# Altium PCB esc_four_layer.PcbDoc
Units mil, origin at the board's own origin, x right, y up, seen from the top; angles counter-clockwise.
Board outline 6000 x 4000 mil, 4 copper layers (Component Side, Ground Plane, Power Plane, Solder Side), stack 60.4 mil thick; 66 components, 36 nets, 187 pads, 6 vias.
Unrouted connection lines stored in the file: 139.
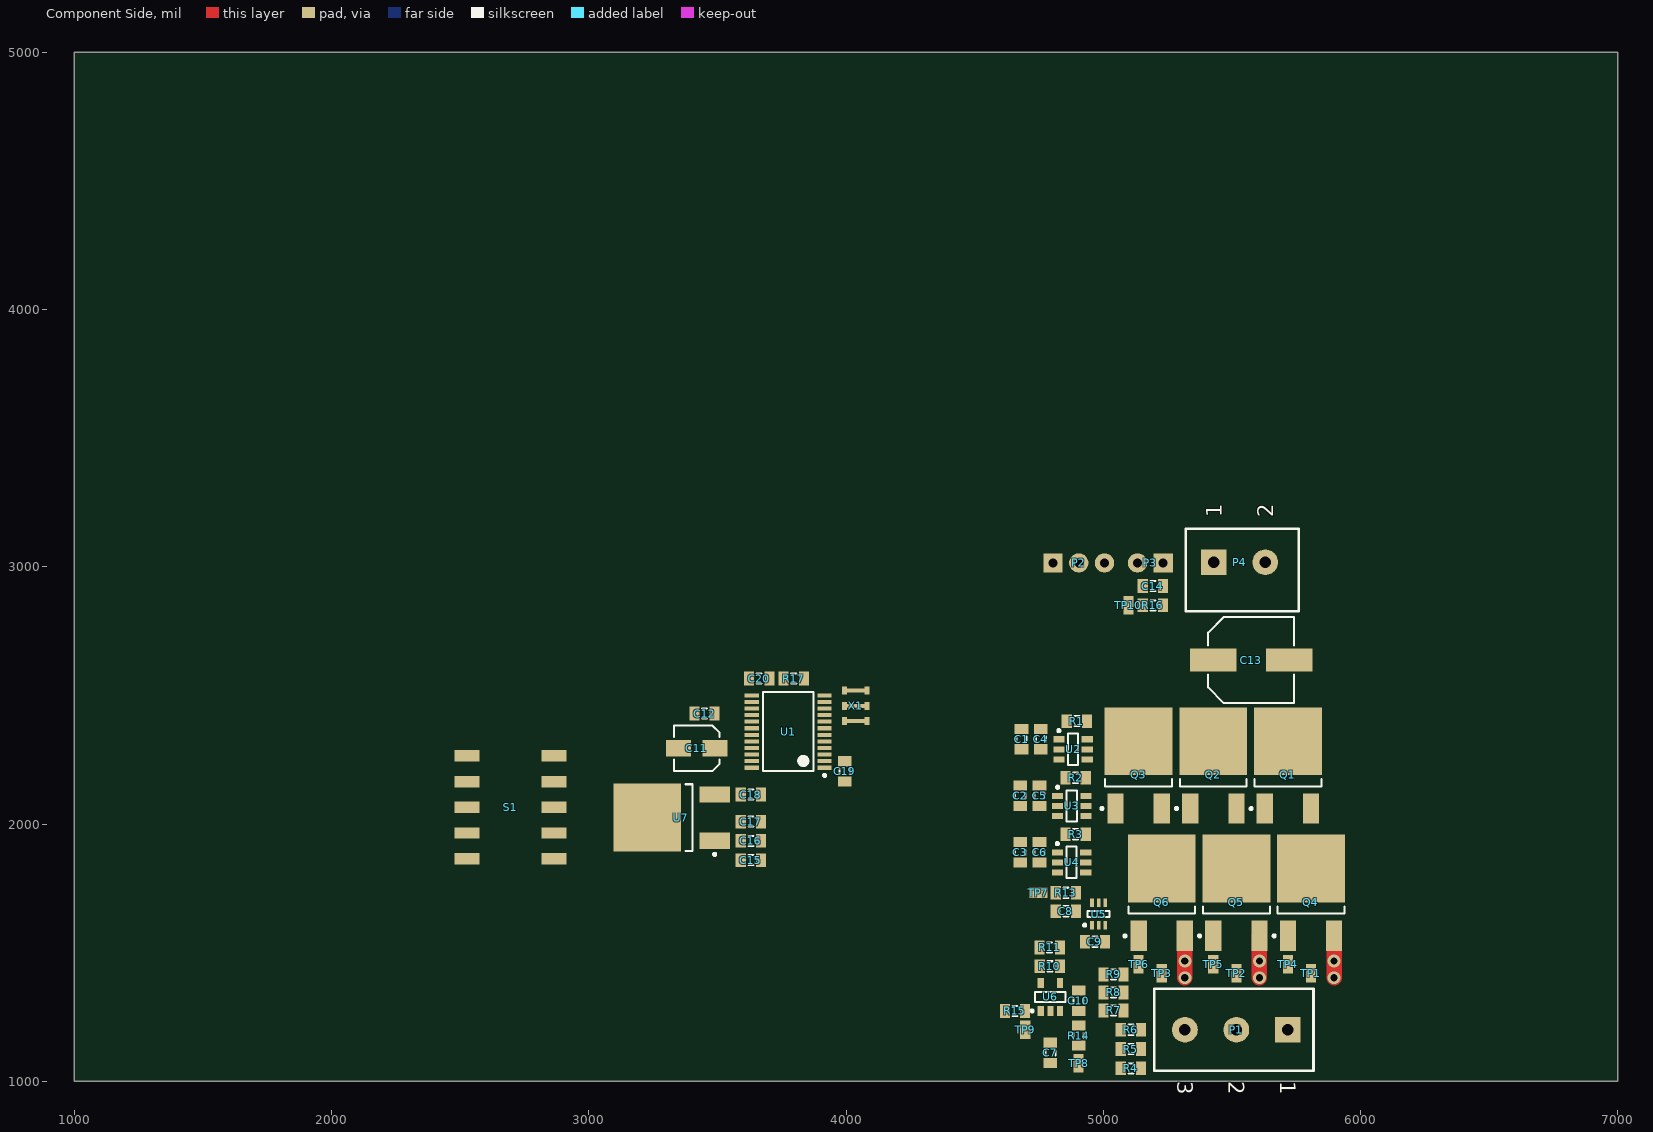
[diagram p0: Component Side view]
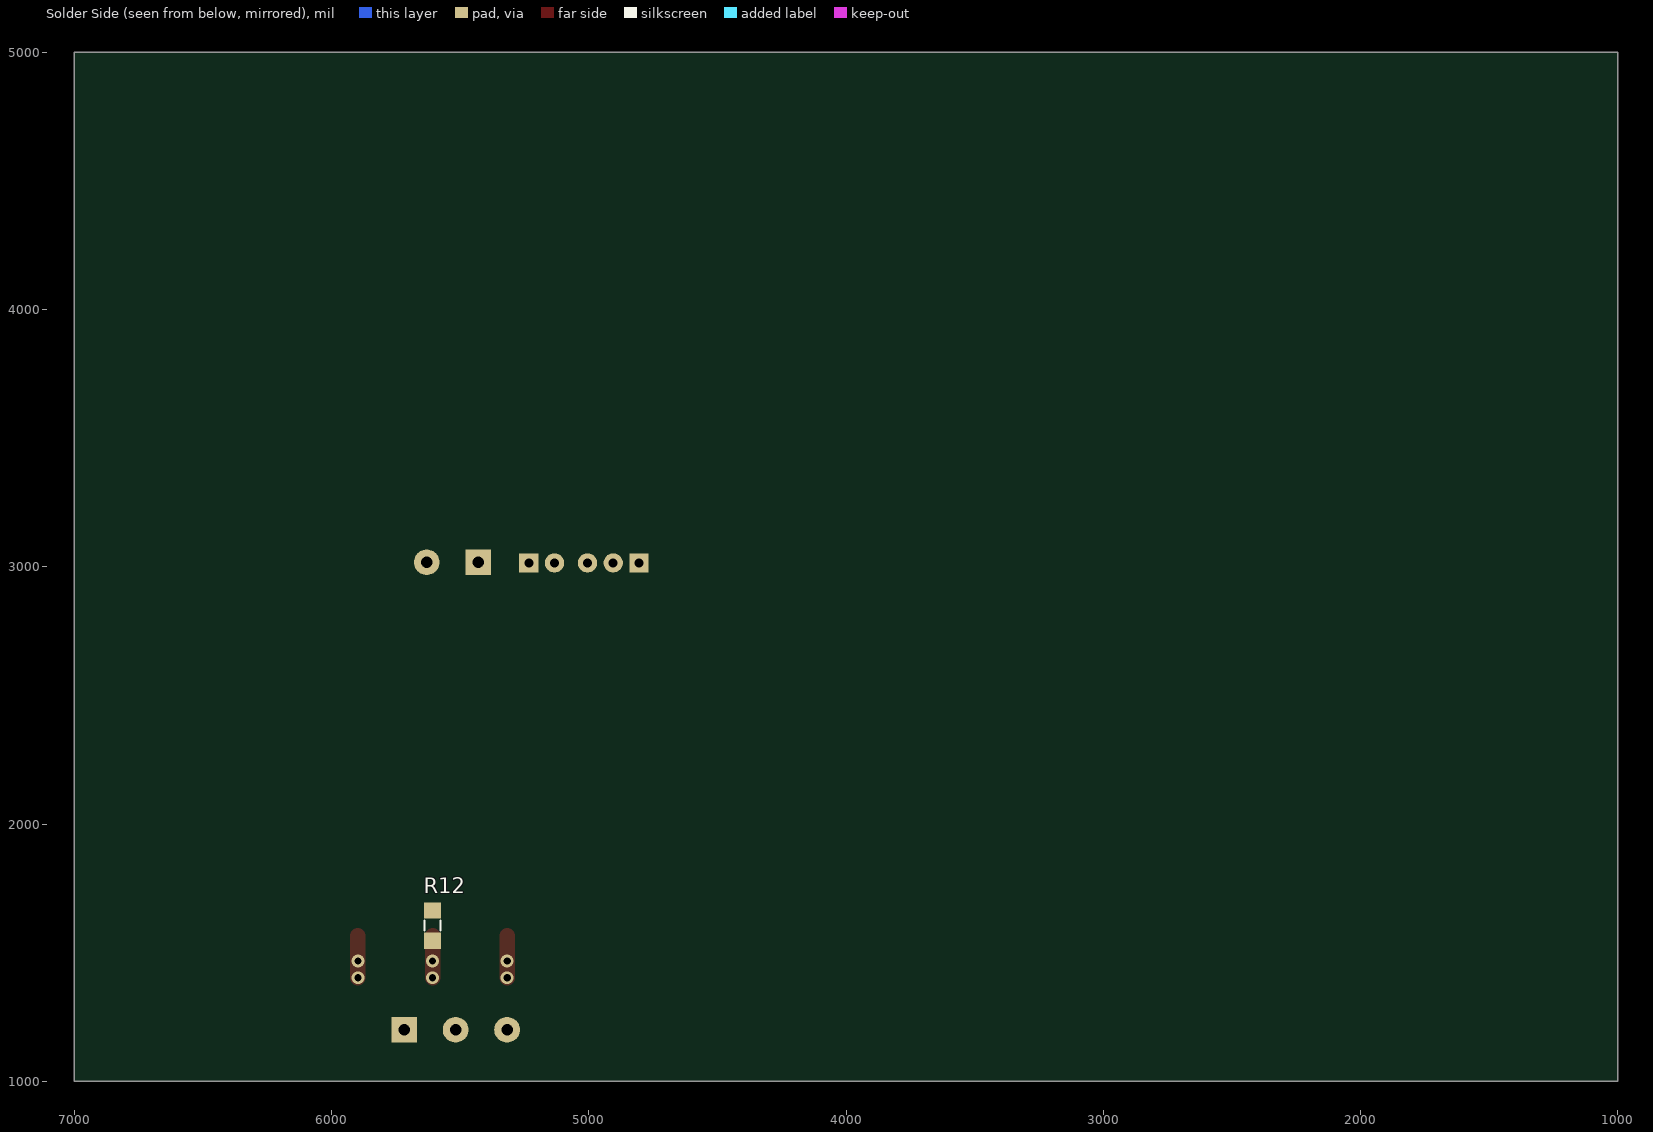
[diagram p1: Solder Side view, seen from below]
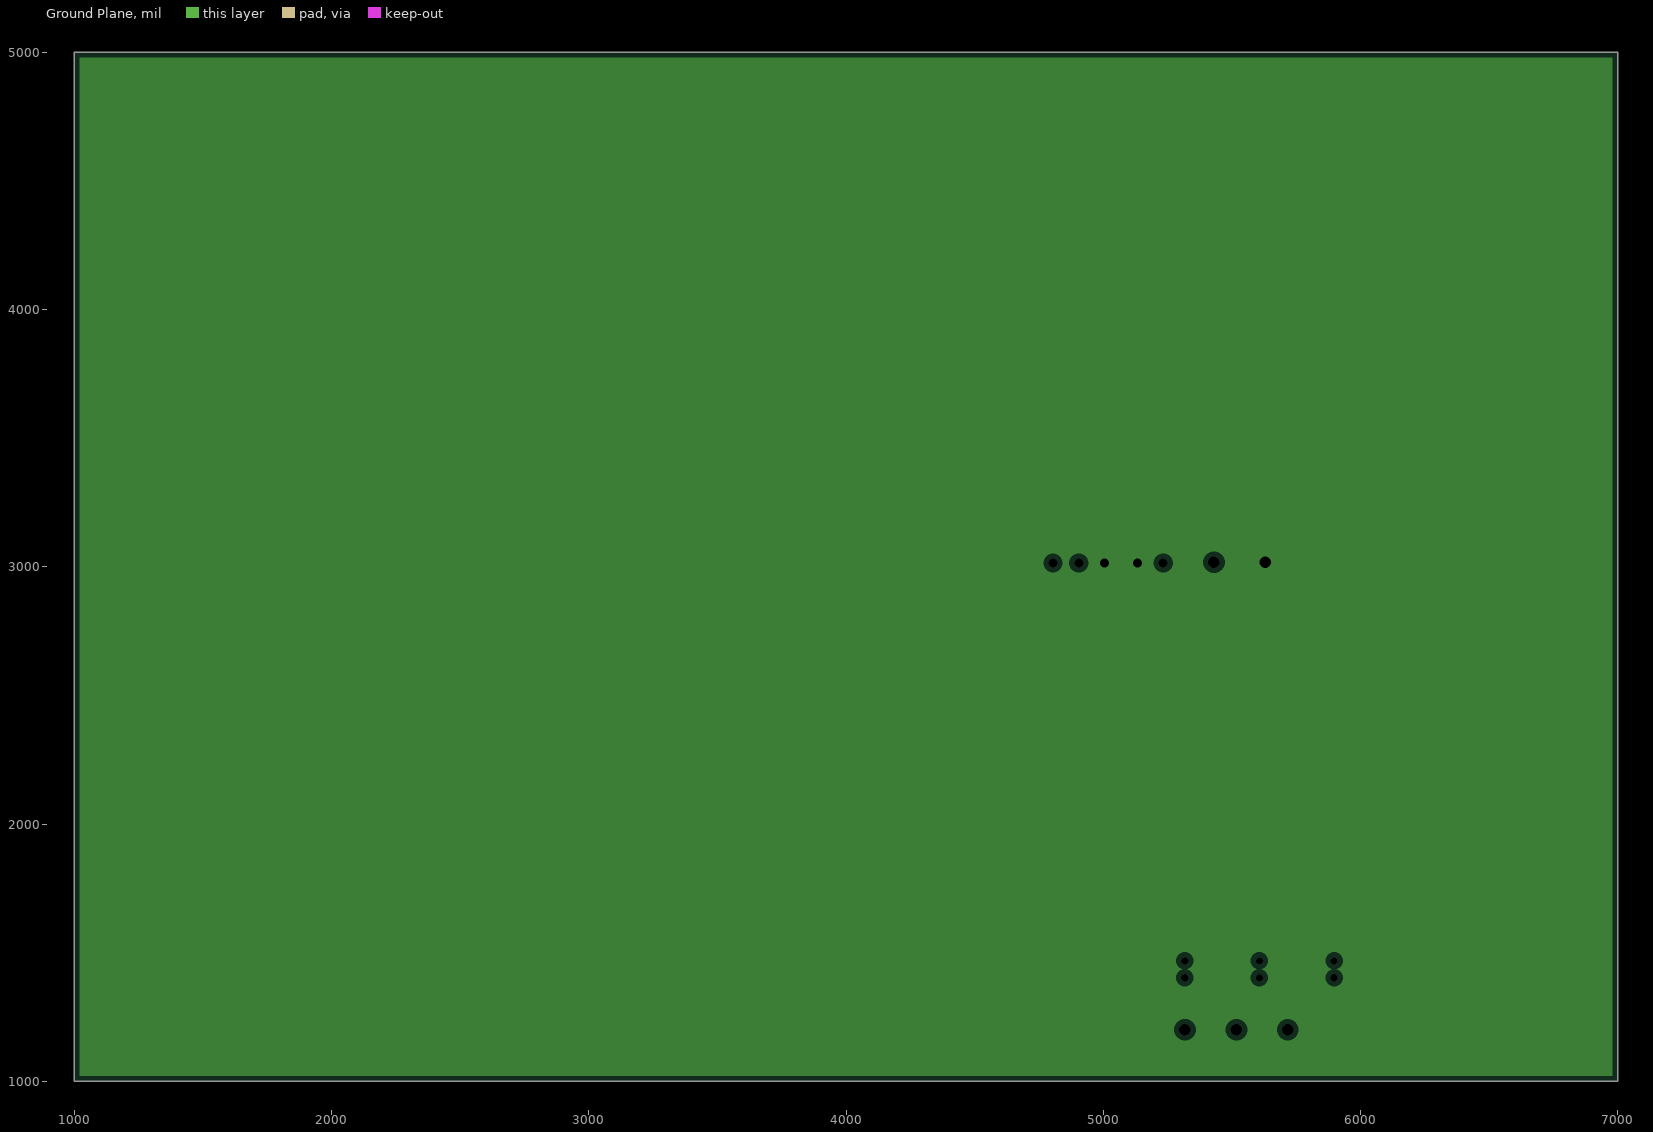
[diagram p2: Ground Plane, clearances drawn from the general rule]
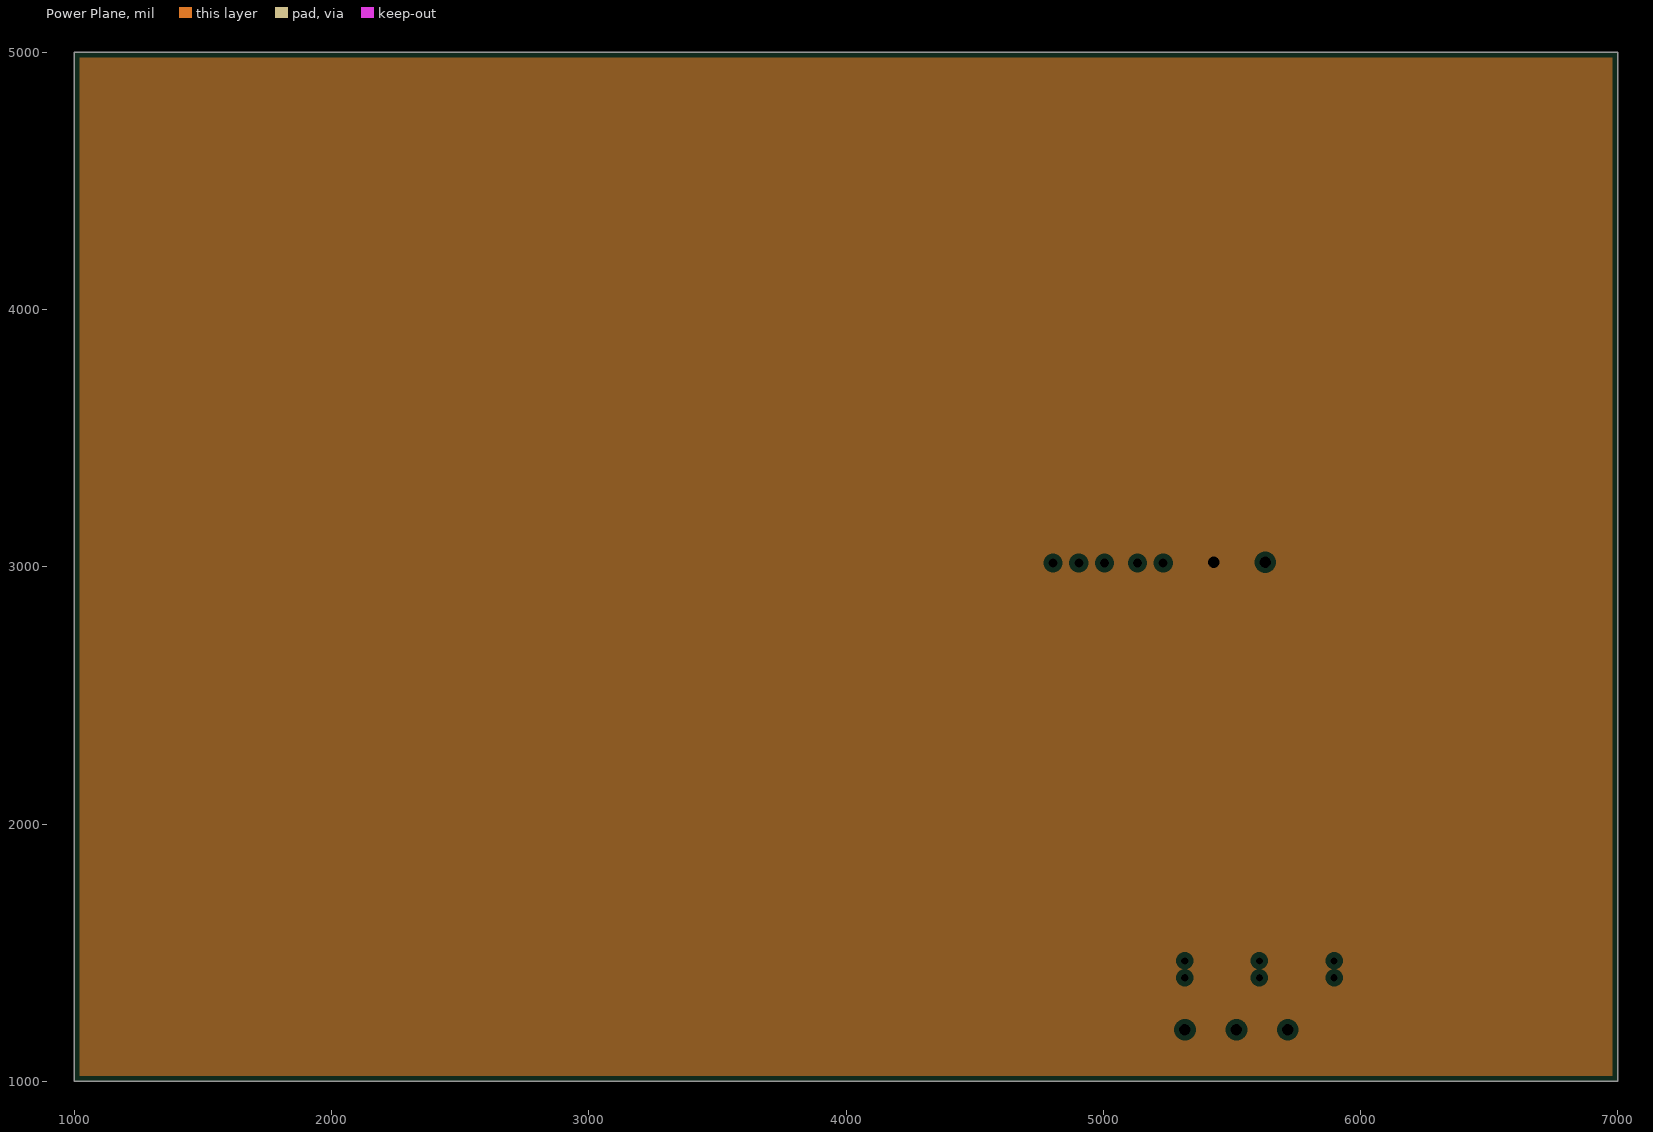
[diagram p3: Power Plane, clearances drawn from the general rule]

## Layer stack, top to bottom
Top Solder: solder mask 0.4, Solder Resist, Dk 3.5
Component Side: signal copper 1.4
Dielectric 1: prepreg 7.5, Dk 4.3
Ground Plane: plane copper 2.8, net GND
Dielectric 3: core 37, FR-4, Dk 4.3
Power Plane: plane copper 2.8, net VBATT+
Dielectric 4: prepreg 7.5, Dk 4.3
Solder Side: signal copper 1.4
Bottom Solder: solder mask 0.4, Solder Resist, Dk 3.5

## Board outline
1000,1000 7000,1000 7000,5000 1000,5000

## Design rules (kind name [scope] priority, off if disabled: settings)
Clearance [All] p1: gap=6 ignorepadtopadclearanceinfootprint=FALSE except(0: Arc-Hole Track-Hole SMDPad-Hole THPad-Hole Via-Hole Fill-Hole Poly-Hole Region-Hole Text-Hole)
PlaneClearance [All] p1: clearance=20
PlaneConnect [All] p1: planeconnectstyle=Relief reliefexpansion=20 reliefentries=4 reliefconductorwidth=10 reliefairgap=10
PolygonConnect PolygonConnect_8 [All vs IsNamedPolygon('VBATT+_L02_P028')] p1: connectstyle=Direct reliefconductorwidth=10 reliefentries=4 polygonreliefangle="90 Angle" airgapwidth=10
PolygonConnect PolygonConnect_7 [All vs IsNamedPolygon('GND_L01_P026')] p2: connectstyle=Direct reliefconductorwidth=10 reliefentries=4 polygonreliefangle="90 Angle" airgapwidth=10
PolygonConnect PolygonConnect_6 [All vs IsNamedPolygon('GND_L01_P024')] p3: connectstyle=Direct reliefconductorwidth=10 reliefentries=4 polygonreliefangle="90 Angle" airgapwidth=10
PolygonConnect PolygonConnect_5 [All vs IsNamedPolygon('GND_L01_P022')] p4: connectstyle=Direct reliefconductorwidth=10 reliefentries=4 polygonreliefangle="90 Angle" airgapwidth=10
PolygonConnect PolygonConnect_4 [All vs IsNamedPolygon('GND_L01_P020')] p5: connectstyle=Direct reliefconductorwidth=10 reliefentries=4 polygonreliefangle="90 Angle" airgapwidth=10
PolygonConnect PolygonConnect_3 [All vs IsNamedPolygon('GND_L01_P018')] p6: connectstyle=Direct reliefconductorwidth=10 reliefentries=4 polygonreliefangle="90 Angle" airgapwidth=10
PolygonConnect PolygonConnect_2 [All vs IsNamedPolygon('GND_L01_P016')] p7: connectstyle=Direct reliefconductorwidth=10 reliefentries=4 polygonreliefangle="90 Angle" airgapwidth=10
PolygonConnect PolygonConnect_1 [All vs IsNamedPolygon('GND_L01_P014')] p8: connectstyle=Direct reliefconductorwidth=10 reliefentries=4 polygonreliefangle="90 Angle" airgapwidth=10
PolygonConnect TOP-GND-1 [All vs IsNamedPolygon('TOP-GND-1')] p9: connectstyle=Direct reliefconductorwidth=10 reliefentries=4 polygonreliefangle="90 Angle" airgapwidth=10
PolygonConnect FET-RETURN [All vs IsNamedPolygon('FET-RETURN')] p10: connectstyle=Direct reliefconductorwidth=10 reliefentries=4 polygonreliefangle="90 Angle" airgapwidth=10
PolygonConnect VBATT-IN_1 [All vs IsNamedPolygon('VBATT-IN')] p11: connectstyle=Direct reliefconductorwidth=10 reliefentries=4 polygonreliefangle="90 Angle" airgapwidth=10
PolygonConnect VBATT-IN [All vs IsNamedPolygon('VBATT-IN')] p12: connectstyle=Direct reliefconductorwidth=10 reliefentries=4 polygonreliefangle="90 Angle" airgapwidth=10
PolygonConnect VBATT-decoupling [All vs IsNamedPolygon('Top Layer-VBATT+')] p13: connectstyle=Direct reliefconductorwidth=10 reliefentries=4 polygonreliefangle="90 Angle" airgapwidth=10
PolygonConnect 5V-plane [All vs IsNamedPolygon('5V')] p14: connectstyle=Direct reliefconductorwidth=10 reliefentries=4 polygonreliefangle="90 Angle" airgapwidth=10
PolygonConnect [All] p15: connectstyle=Relief reliefconductorwidth=10 reliefentries=4 polygonreliefangle="90 Angle" airgapwidth=10
RoutingVias [All] p1: holewidth=28 width=50 viastyle="Through Hole" minholewidth=28 minwidth=50 maxholewidth=28 maxwidth=50
SolderMaskExpansion [All] p1: expansion=4
Width [All] p1: maxlimit=118.11 minlimit=5.98 preferedwidth=10
28 further rules are at their usual default settings.

## Classes and differential pairs
component class "Output Stage": C1 C2 C3 C4 C5 C6 C7 C8 C9 C10 Q1 Q2 Q3 Q4 Q5 Q6 R1 R2 R3 R4 R5 R6 R7 R8 R9 R10 R11 R12 R13 R14 R15 TP1 TP2 TP3 TP4 TP5 TP6 TP7 TP8 TP9 U2 U3 U4 U5 U6
component class esc: C11 C12 P1 P2 S1 U1 X1
component class "ESC Control Inputs": C13 C14 C15 C16 C17 C18 C19 C20 P3 P4 R16 R17 TP10 U7

## Components (designator, comment, footprint, x,y, rotation, side; value= is the part's Value field where it differs from the comment)
C1 "1 uF" CAP-CER-0805-TALL 4682.5,2329.99 r90 top
C2 "1 uF" CAP-CER-0805-TALL 4677.5,2109.99 r90 top
C3 "1 uF" CAP-CER-0805-TALL 4677.5,1889.99 r90 top
C4 "0.1 uF" CAP-CER-0805-SHORT 4757.5,2329.99 r90 top
C5 "0.1 uF" CAP-CER-0805-SHORT 4752.5,2109.99 r90 top
C6 "0.1 uF" CAP-CER-0805-SHORT 4752.5,1889.99 r90 top
C7 "0.1 uF" CAP-CER-0805-SHORT 4794.38,1110 r90 top
C8 "10 nF" CAP-CER-0805-SHORT 4855.01,1660.81 r0 top
C9 "0.1 uF" CAP-CER-0805-SHORT 4967.88,1542.5 r0 top
C10 "22 pF" CAP-CER-0805-SHORT 4904.38,1312.72 r270 top
C11 "22uF" CAP-CAN-5.3x5.3 3420,2294.38 r180 top
C12 "0.1 uF" CAP-CER-0805-SHORT 3450,2429.38 r0 top
C13 "220 uF" CAP-CAN-8.3x8.3 5575,2637.49 r0 top
C14 "10 nF" CAP-CER-0805-SHORT 5193.12,2925 r0 top
C15 "0.22 uF" CAP-CER-0805-SHORT 3630,1859.38 r180 top
C16 "0.1 uF" CAP-CER-0805-SHORT 3630,1934.38 r180 top
C17 "10 nF" CAP-CER-0805-SHORT 3630,2009.38 r180 top
C18 "0.1 uF" CAP-CER-0805-SHORT 3630,2114.38 r180 top
C19 "0.47 uF" CAP-CER-0805-TALL 3995,2204.38 r90 top
C20 "1 uF" CAP-CER-0805-TALL 3662.51,2565.62 r0 top
P1 "3Pos Screw Terminal" "3Pos Screw Terminal" 5717.5,1199.99 r270 top
P2 "3Pos Pin Header" "3Pos Pin Header" 4805,3015 r90 top
P3 "2Pos Pin Header" "2Pos Pin Header" 5233.12,3015 r270 top
P4 "2Pos Screw Terminal" "2Pos Screw Terminal" 5430,3017.49 r90 top
Q1 "P-Channel" DPAK 5717.74,2189.99 r90 top
Q2 "P-Channel" DPAK 5427.74,2189.99 r90 top
Q3 "P-Channel" DPAK 5137.5,2189.99 r90 top
Q4 "N-Channel" DPAK 5807.5,1694.99 r90 top
Q5 "N-Channel" DPAK 5517.5,1694.99 r90 top
Q6 "N-Channel" DPAK 5227.5,1694.99 r90 top
R1 "1K" RES-0805 4897.5,2399.99 r0 top
R2 "1K" RES-0805 4892.5,2179.99 r0 top
R3 "1K" RES-0805 4892.5,1959.99 r0 top
R4 "10K" RES-0805 5107.5,1049.99 r0 top
R5 "10K" RES-0805 5107.5,1124.99 r0 top
R6 "10K" RES-0805 5107.5,1199.99 r0 top
R7 "1K" RES-0805 5040,1274.99 r0 top
R8 "1K" RES-0805 5040,1344.99 r0 top
R9 "1K" RES-0805 5040,1414.99 r0 top
R10 "100K" RES-0805 4792.5,1446.76 r0 top
R11 "100K" RES-0805 4791.88,1519.99 r180 top
R12 "1m" RES-1206 5607.26,1605 r90 bottom
R13 "33" RES-0805 4855.01,1732.5 r180 top
R14 "1K" RES-0805 4904.38,1177.72 r270 top
R15 "10K" RES-0805 4656.88,1273.35 r180 top
R16 "33" RES-0805 5193.12,2850 r180 top
R17 "220K" RES-0805 3796.88,2565.62 r0 top
S1 "5Pos DIP Switch" DIP-SW-5 2526.42,2265 r0 top
TP1 "Test Point" "0603 Test Point" 5807.5,1419.99 r90 top
TP2 "Test Point" "0603 Test Point" 5517.5,1420.22 r90 top
TP3 "Test Point" "0603 Test Point" 5227.26,1419.99 r270 top
TP4 "Test Point" "0603 Test Point" 5717.74,1454.99 r90 top
TP5 "Test Point" "0603 Test Point" 5427.5,1454.99 r90 top
TP6 "Test Point" "0603 Test Point" 5137.74,1454.99 r90 top
TP7 "Test Point" "0603 Test Point" 4747.5,1732.5 r0 top
TP8 "Test Point" "0603 Test Point" 4904.38,1070.22 r270 top
TP9 "Test Point" "0603 Test Point" 4696.88,1199.99 r270 top
TP10 "Test Point" "0603 Test Point" 5097.5,2850 r270 top
U1 "TB6575FNG" SSOP24-0.65 3775,2359.38 r180 top
U2 "MOSFET Driver" SOT-23-6 4882.5,2289.99 r0 top
U3 "MOSFET Driver" SOT-23-6 4877.5,2069.99 r0 top
U4 "MOSFET Driver" SOT-23-6 4876.75,1850.62 r0 top
U5 "INA199A2" SC70 4981.88,1650 r90 top
U6 "Comparator, Open-Drain" SOT-23-5 4794.38,1327.49 r90 top
U7 "Linear 5V 500mA" DPAK 3359.45,2024.62 r180 top
X1 "4.19 MHz, 15 pF" CSTCR 4037.5,2459.38 r90 top

## Footprints (in the part's own frame and the unit in brackets; to place one, negate y for a bottom-side part, rotate by r counter-clockwise, add the part's x,y. Pads: shape width x height; smd on the part's side, far side on the other; paste and mask are expansions set on the pad)
"2Pos Pin Header" [mil] "Female, 0.1\" Pitch"
  rect 75x75 hole 35: 1(0,0)
  round 75 hole 35: 2(0,-100)
  body extent -47,-167 47,67, height 327
"2Pos Screw Terminal" [mil] "0.2\" Pitch"
  rect 100x100 hole 45: 1(0,0)
  round 100 hole 45: 2(0,-200)
  silkscreen extent -190,-330 130,110, body extent -179,-319 120,99, height 394
"3Pos Pin Header" [mil] "Male, 0.1\" Pitch"
  rect 75x75 hole 35: 1(0,0)
  round 75 hole 35: 2(0,-100) 3(0,-200)
  body extent -50,-250 50,50, height 374
"3Pos Screw Terminal" [mil] "0.2\" Pitch"
  rect 100x100 hole 45: 1(0,0)
  round 100 hole 45: 2(0,-200) 3(0,-400)
  silkscreen extent -160,-520 160,100, body extent -154,-515 155,96, height 411
"0603 Test Point" [mm]
  rect 1.8x1 smd: 1(0,0)
  body extent -0.8,-0.45 0.8,0.45, height 1.16
CAP-CAN-5.3x5.3 [mm] "Aluminum Electrolytic Capacitor, Body 4.30x4.30x5.50mm, IPC Low Density"
  rect 2.5x1.6 smd: 1(-1.8,0) 2(1.8,0)
  silkscreen extent -2.25,-2.25 2.25,2.25, body extent -2.47,-2.25 2.47,2.25, height 5.5
CAP-CAN-8.3x8.3 [mm] "Aluminum Electrolytic Capacitor, Body 8.30x8.30x10.50mm, IPC Low Density"
  rect 4.6x2.3 smd: 1(-3.75,0) 2(3.75,0)
  silkscreen extent -4.25,-4.25 4.25,4.25, body extent -4.95,-4.25 4.95,4.25, height 10.5
CAP-CER-0805-SHORT [mm] "Chip Capacitor, 2-Leads, Body 2.00x1.25mm, IPC Medium Density"
  rect 1x1.35 smd: 1(-1,0) 2(1,0)
  silkscreen extent -0.25,-0.5 0.25,0.5, body extent -1.1,-0.72 1.1,0.72, height 0.9
CAP-CER-0805-TALL [mm] "Chip Capacitor, 2-Leads, Body 2.00x1.25mm, IPC Medium Density"
  rect 1x1.35 smd: 1(-1,0) 2(1,0)
  silkscreen extent -0.25,-0.5 0.25,0.5, body extent -1.1,-0.72 1.1,0.72, height 1.1
CSTCR [mm] "Ceramic Oscillator Built-In Capacitance"
  rect 0.8x0.5 smd: 1(1.5,-1.1) 1(1.5,1.1) 2(0,1.1) 2(0,-1.1) 3(-1.5,-1.1) 3(-1.5,1.1)
  rect 0.4x2.6 smd: 1(1.5,0) 2(0,0) 3(-1.5,0)
  body extent -2.25,-1 2.25,1, height 1.15
DIP-SW-5 [mm] "5 0.1\" Pitch SMT Dip Switches"
  rect 2.44x1.13 smd: 1(0,0) 2(0,-2.54) 3(0,-5.08) 4(0,-7.62) 5(0,-10.16) 6(8.6,-10.16) 7(8.6,-7.62) 8(8.6,-5.08) 9(8.6,-2.54) 10(8.6,0)
  body extent -0.64,-12.16 9.27,2.01, height 4.28
DPAK [mm] "D-PAK, 3-Pads, Body 6.20x6.66mm (max), IPC Medium Density"
  rect 3x1.6 smd: 1(-3.3,2.28) 3(-3.3,-2.28)
  rect 6.7x6.7 smd: 2(3.35,0)
  silkscreen extent -3.42,-3.3 -0.4,3.75, body extent -3.81,-3.3 5.91,3.3, height 2.63
RES-0805 [mm] "Chip Resistor, 2-Leads, Body 2.00x1.25mm, IPC Medium Density"
  rect 1x1.35 smd: 1(-1,0) 2(1,0)
  silkscreen extent -0.25,-0.5 0.25,0.5, body extent -1.07,-0.7 1.07,0.7, height 0.65
RES-1206 [mm] "Chip Resistor, 2-Leads, Body 3.20x1.60mm, IPC Medium Density"
  rect 1.6x1.7 smd: 1(-1.5,0) 2(1.5,0)
  silkscreen extent -0.5,-0.8 0.5,0.8, body extent -1.72,-0.85 1.73,0.85, height 0.8
SC70 [mm] "SOT23, 6-Leads, Body 2.00x2.10mm, Pitch 0.65mm, IPC Medium Density"
  rect 0.85x0.35 smd: 1(-1.1,0.65) 2(-1.1,0) 3(-1.1,-0.65) 4(1.1,-0.65) 5(1.1,0) 6(1.1,0.65)
  silkscreen extent -1.22,-1.1 0.3,1.5, body extent -1.2,-1.07 1.2,1.07, height 1.1
SOT-23-5 [mm] "SOT23, 5-Leads, Body 2.90x2.80mm, Pitch 0.95mm, IPC Medium Density"
  rect 1x0.6 smd: 1(-1.375,0.95) 2(-1.375,0) 3(-1.375,-0.95) 4(1.375,-0.95) 5(1.375,0.95)
  silkscreen extent -1.5,-1.5 0.5,1.92, body extent -1.6,-1.5 1.6,1.5, height 1.45
SOT-23-6 [mm] "SOT23, 6-Leads, Body 2.90x2.70mm, Pitch 1.00mm, IPC Medium Density"
  rect 1.1x0.6 smd: 1(-1.4,1) 2(-1.4,0) 3(-1.4,-1) 4(1.4,-1) 5(1.4,0) 6(1.4,1)
  silkscreen extent -1.52,-1.55 0.5,1.97, body extent -1.7,-1.55 1.7,1.55, height 1.45
SSOP24-0.65 [mm] "TSOP, 24-Leads, Body 7.70x5.60mm, Pitch 0.65mm, IPC Medium Density"
  rect 1.4x0.4 smd: 1(-3.6,3.575) 2(-3.6,2.925) 3(-3.6,2.275) 4(-3.6,1.625) 5(-3.6,0.975) 6(-3.6,0.325) 7(-3.6,-0.325) 8(-3.6,-0.975) 9(-3.6,-1.625) 10(-3.6,-2.275) 11(-3.6,-2.925) 12(-3.6,-3.575) 13(3.6,-3.575) 14(3.6,-2.925) 15(3.6,-2.275) 16(3.6,-1.625) 17(3.6,-0.975) 18(3.6,-0.325) 19(3.6,0.325) 20(3.6,0.975) 21(3.6,1.625) 22(3.6,2.275) 23(3.6,2.925) 24(3.6,3.575)
  silkscreen extent -3.73,-3.9 2.5,4.45, body extent -3.8,-3.9 3.8,3.9, height 1.6

## Part data
C1 C2 C3: library part CAP-CER-1uF-10V, "10%, 0805", ComponentLink1Description="Capacitor Book (Amazon)", ComponentLink1URL=https://www.amazon.com/gp/product/B0728HBDRW/
C4 C5 C6 C7 C9 C12 C16 C18: library part CAP-CER-0.1uF-25V, "10%, 0805", ComponentLink1Description="Capacitor Book (Amazon)", ComponentLink1URL=https://www.amazon.com/gp/product/B0728HBDRW/
C8 C14: library part CAP-CER-10nF-50V, "10%, 0805", ComponentLink1Description="Capacitor Book (Amazon)", ComponentLink1URL=https://www.amazon.com/gp/product/B0728HBDRW/
C10: library part CAP-CER-22pF-50V, "±5%, 0805", ComponentLink1Description="Capacitor Book (Amazon)", ComponentLink1URL=https://www.amazon.com/gp/product/B0728HBDRW/
C11: library part CAP-CAN-22uF-35V, "±20%, 5.3mm x 5.3mm", Supplier Part Number 1=PCE3838DKR-ND, Supplier 1=Digi-Key
C13: library part CAP-CAN-220uF-35V, "±20%, 8.3mm x 8.3mm", Supplier Part Number 1=PCE3955DKR-ND, Supplier 1=Digi-Key
C15: library part CAP-CER-0.22uF-50V, "10%, 0805", ComponentLink1Description="Capacitor Book (Amazon)", ComponentLink1URL=https://www.amazon.com/gp/product/B0728HBDRW/
C17: library part CAP-CER-10nF-50V, "±10%, 0805", ComponentLink1Description="Capacitor Book (Amazon)", ComponentLink1URL=https://www.amazon.com/gp/product/B0728HBDRW/
C19: library part CAP-CER-0.47uF-50V, "±10%, 0805", ComponentLink1Description="Capacitor Book (Amazon)", ComponentLink1URL=https://www.amazon.com/gp/product/B0728HBDRW/
C20: library part CAP-CER-1uF-10V, "±10%, 0805", ComponentLink1Description="Capacitor Book (Amazon)", ComponentLink1URL=https://www.amazon.com/gp/product/B0728HBDRW/
P1: "0.2\" Pitch 1x3"
P2: "0.1\" Pitch 1x3"
P3: "0.1\" Pitch 1x2"
P4: "0.2\" Pitch 1x2"
Q1 Q2 Q3: library part PMOS-1.9VT-40VDS-40A, "P-Channel MOSFET", Supplier Part Number 1=785-1351-6-ND, ComponentLink1Description=Datasheet, ComponentLink1URL=http://aosmd.com/res/data_sheets/AOD4189.pdf, Supplier 1=Digi-Key
Q4 Q5 Q6: library part NMOS-2.5VT-60VDS-35A, "N-Channel MOSFET", Supplier Part Number 1=497-7965-6-ND, ComponentLink1Description=Datasheet, ComponentLink1URL=https://www.st.com/content/ccc/resource/technical/document/datasheet/48/eb/5d/41/e2/c9/48/f2/CD00002363.pdf/files/CD00002363.pdf/jcr:content/translations/en.CD00002363.pdf, Supplier 1=Digi-Key
R1 R2 R3 R7 R8 R9 R14: library part RES-1K-1/8W, "0805", ComponentLink1Description="Resistor Book (Amazon)", ComponentLink1URL=https://www.amazon.com/gp/product/B071J21FYF/
R4 R5 R6 R15: library part RES-10K-1/8W, "0805", ComponentLink1Description="Resistor Book (Amazon)", ComponentLink1URL=https://www.amazon.com/gp/product/B071J21FYF/
R10 R11: library part RES-100K-1/8W, "0805", ComponentLink1Description="Resistor Book (Amazon)", ComponentLink1URL=https://www.amazon.com/gp/product/B071J21FYF/
R12: library part RES-1m-1W, "0805", Supplier Part Number 1=696-1369-6-ND, Supplier 1=Digi-Key
R13 R16: library part RES-33-1/8W, "0805", ComponentLink1Description="Resistor Book (Amazon)", ComponentLink1URL=https://www.amazon.com/gp/product/B071J21FYF/
R17: library part RES-220K-1/8W, "0805", ComponentLink1Description="Resistor Book (Amazon)", ComponentLink1URL=https://www.amazon.com/gp/product/B071J21FYF/
S1: "5 Position 0.1\" SMT Dip Switch", Supplier Part Number 1=CT2195LPST-ND, Supplier 1=Digi-Key
TP1 TP2 TP3 TP4 TP5 TP6 TP7 TP8 TP9 TP10: "0603", Supplier Part Number 1=A106145DKR-ND, Supplier 1=Digi-Key
U1: "Sensorless 3-Phase BLDC Controller", Supplier Part Number 1=TB6575FNGC8ELDKR-ND, ComponentLink1Description=Datasheet, ComponentLink1URL=toshiba.semicon-storage.com/info/docget.jsp?did=2162&prodName=TB6575FNG, Supplier 1=Digi-Key
U2 U3 U4: library part MCP14A0052, "0.5A MOSFET Driver", Supplier Part Number 1=MCP14A0052T-E/CHDKR-ND, ComponentLink1Description=Datasheet, ComponentLink1URL=http://ww1.microchip.com/downloads/en/DeviceDoc/20005369A.pdf, Supplier 1=Digi-Key
U5: "50 V/V, Current-Shunt Monitor", Supplier Part Number 1=296-27329-6-ND, ComponentLink1Description=Datasheet, ComponentLink1URL=http://www.ti.com/lit/ds/symlink/ina199.pdf, Supplier 1=Digi-Key
U6: library part LMC7221, Supplier Part Number 1=LMC7221BIM5X/NOPBDKR-ND, ComponentLink1Description=Datasheet, ComponentLink1URL=http://www.ti.com/lit/ds/symlink/lmc7221.pdf, Supplier 1=Digi-Key
U7: library part L78M05ACDT-TR, "Linear Regulator, 5V, 500mA", Supplier Part Number 1=497-1202-6-ND, ComponentLink1Description=Datasheet, ComponentLink1URL=https://media.digikey.com/pdf/Data%20Sheets/ST%20Microelectronics%20PDFS/L78MxxAB,AC%20.pdf, Supplier 1=Digi-Key
X1: library part XTAL-4.19MHz-15pF, "Ceramic, 3-SMD, Built-In Capacitance", Supplier Part Number 1=490-1201-6-ND, ComponentLink1Description="Part Numbering", ComponentLink1URL=https://www.murata.com/en-us/products/productdata/8796821913630/L0430E.pdf, ComponentLink2Description="Application Note", ComponentLink2URL=https://www.murata.com/~/media/webrenewal/support/library/catalog/products/timingdevice/ceralock/p17e.ashx, ComponentLink3Description=Datasheet, ComponentLink3URL=https://www.murata.com/~/media/webrenewal/support/library/catalog/products/timingdevice/ceralock/p16e.ashx, Supplier 1=Digi-Key

## Via types
v1: diameter 50, hole 28, Component Side to Solder Side, 6 vias

## Nets (pads, with @x,y where several pads share a name; then routed paths per layer and width w, separated by ;. In a path a pad name is that pad's centre, name@x,y a point inside that pad or via, vN(x,y) a via of type N, cw(c..) or ccw(c..) an arc to the next point about the centre after c; other vN are vias at no path point)
5V: C9.2 C11.1 C12.2 C18.2 R15.2 S1.3 S1.4 U1.21 U5.3 U7.3
FET_RET: Q4.3 Q5.3 Q6.3 R11.2 R12.1 U5.4 | length 487.7
  Component Side w60: v1(5317.26,1402.5) v1(5317.26,1467.5) Q6.3 ; v1(5607.26,1402.5) v1(5607.26,1467.5) Q5.3 ; v1(5897.26,1402.5) v1(5897.26,1467.5) Q4.3
GND: C1.1 C2.1 C3.1 C4.1 C5.1 C6.1 C7.1 C8.1 C9.1 C10.1 C11.2 C12.1 C13.2 C14.1 C15.1 C16.1 C17.1 C18.1 C19.1 C20.1 P2.3 P3.2 P4.2 R1.1 R2.1 R3.1 R7.1 R8.1 R9.1 R12.2 S1.1 S1.2 S1.5 U1.1 U2.2 U2.5 U3.2 U3.5 U4.2 U4.5 U5.1 U5.2 U5.5 U6.5 U7.2 X1.2
IP: C20.2 R17.1 U1.9
Motor_Com: R4.1 R5.1 R6.1 R14.2 TP8.1
Motor_U: P1.1 Q1.3 Q4.2 R4.2 TP1.1
Motor_V: P1.2 Q2.3 Q5.2 R5.2 TP2.1
Motor_W: P1.3 Q3.3 Q6.2 R6.2 TP3.1
NetC8_2: C8.2 R13.1 U5.6
NetC10_2: C10.2 R14.1 U6.3
NetC14_2: C14.2 P3.1 R16.1
NetP2_1: P2.1 U1.19
NetP2_2: P2.2 U1.7
NetQ1_1: Q1.1 R1.2 U2.6
NetQ2_1: Q2.1 R2.2 U3.6
NetQ3_1: Q3.1 R3.2 U4.6
NetR10_2: R10.2 R11.1 U6.4
NetR16_2: R16.2 TP10.1 U1.5
NetS1_6: S1.6 U1.20
NetS1_7: S1.7 U1.6
NetS1_8: S1.8 U1.12
NetS1_9: S1.9 U1.4
NetS1_10: S1.10 U1.24
NetU1_10: U1.10 X1.3
NetU1_11: U1.11 X1.1
OC: R13.2 TP7.1 U1.22
SC: C19.2 U1.2
START: R17.2 U1.8
UN: Q4.1 R7.2 TP4.1 U1.14
UP: U1.13 U2.3
VBATT+: C1.2 C2.2 C3.2 C4.2 C5.2 C6.2 C7.2 C13.1 C15.2 C16.2 C17.2 P4.1 Q1.2 Q2.2 Q3.2 R10.1 U2.1 U3.1 U4.1 U6.2 U7.1
VN: Q5.1 R8.2 TP5.1 U1.16
VP: U1.15 U3.3
WAVE: R15.1 TP9.1 U1.23 U6.1
WN: Q6.1 R9.2 TP6.1 U1.18
WP: U1.17 U4.3
pads on no net: U1.3 U2.4 U3.4 U4.4

## Polygon pours and split planes (outlines as drawn)
VBATT+ on Power Plane (split plane): 6979.9,1020.1 1020.1,1020.1 1020.1,4979.9 6979.9,4979.9
GND on Ground Plane (split plane): 6979.9,1020.1 1020.1,1020.1 1020.1,4979.9 6979.9,4979.9

## Text inside footprints (layer, text, board x,y; h text height)
P1: Top Overlay "3" at 5287.5,999.99 h60 r270; Top Overlay "1" at 5687.5,999.99 h60 r270; Top Overlay "2" at 5487.5,999.99 h60 r270
P4: Top Overlay "1" at 5460,3192.49 h60 r90; Top Overlay "2" at 5660,3192.49 h60 r90